# Altium PCB DBG-010.PcbDoc (part 2 of 2)
Units mil, origin at the board's own origin, x right, y up, seen from the top; angles counter-clockwise.
Board outline 2950 x 3200 mil, 4 copper layers (Top Layer, Layer 1, Layer 2, Bottom Layer), stack 61.811 mil thick; 92 components, 108 nets, 611 pads, 149 vias.
Unrouted connection lines stored in the file: 194.
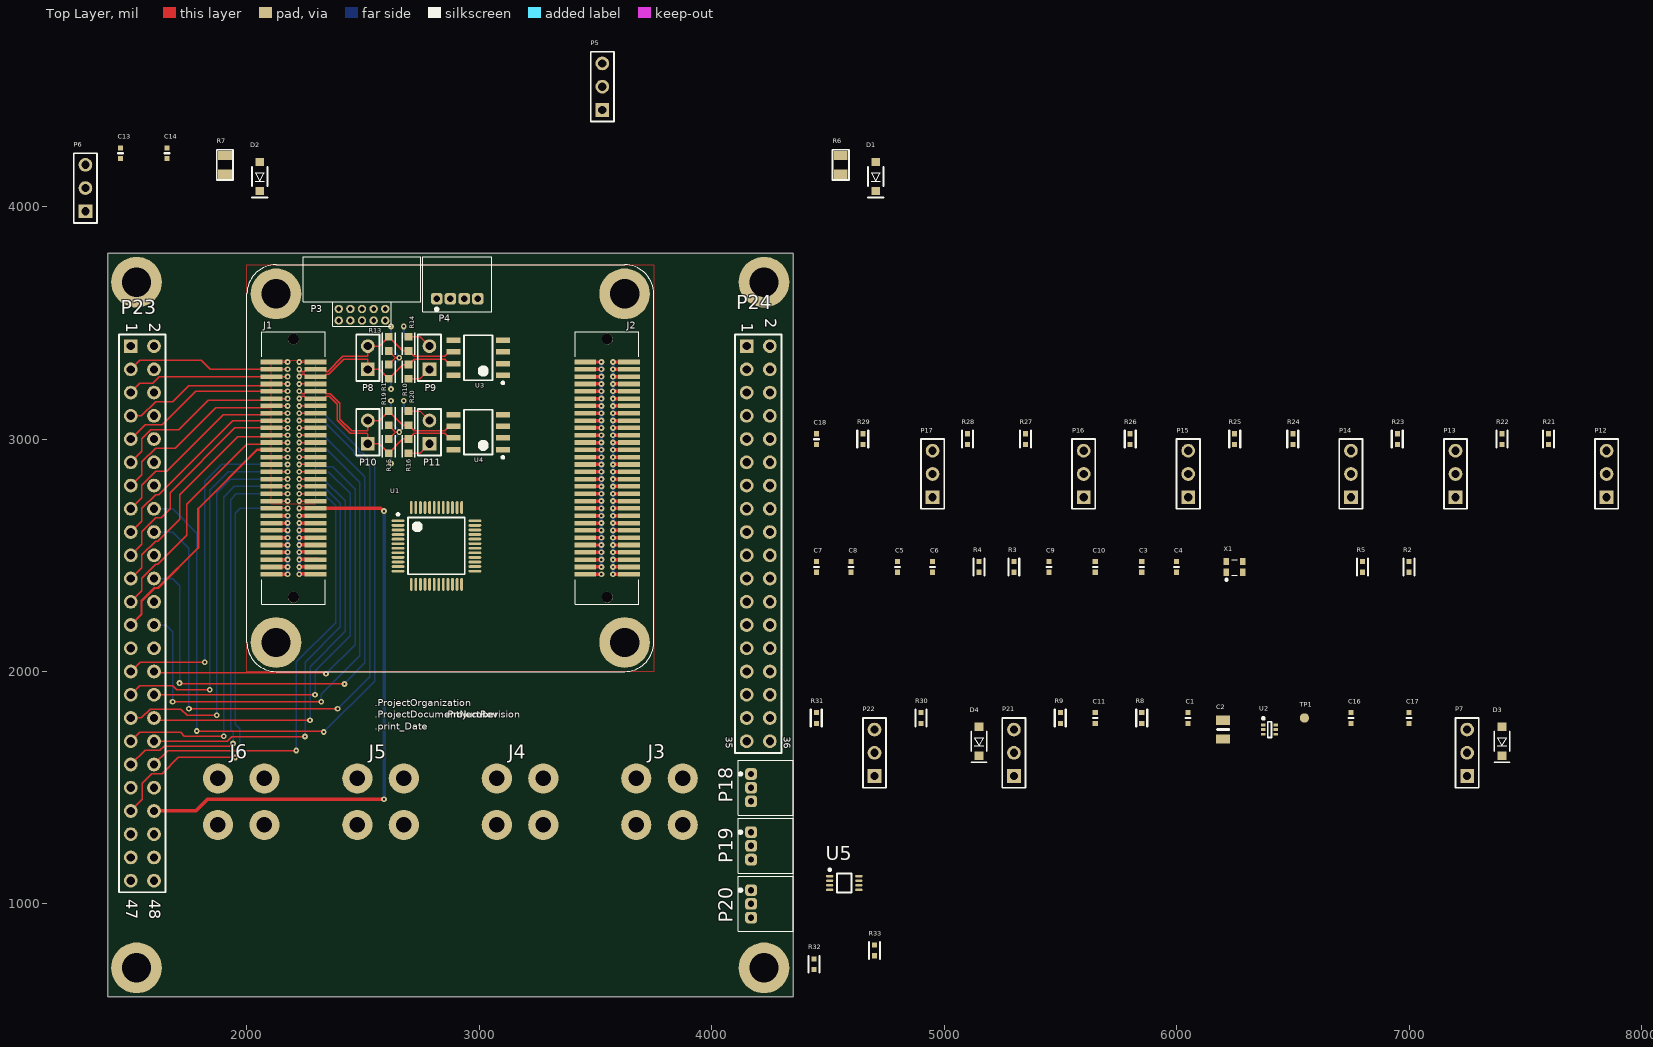
[diagram p0: Top Layer view]

## Via types
v1: diameter 25, hole 10, Top Layer to Bottom Layer, tented both sides, 120 vias
v2: diameter 25, hole 10, Top Layer to Bottom Layer, 29 vias

## Nets (pads, with @x,y where several pads share a name; then routed paths per layer and width w, separated by ;. In a path a pad name is that pad's centre, name@x,y a point inside that pad or via, vN(x,y) a via of type N, cw(c..) or ccw(c..) an arc to the next point about the centre after c; other vN are vias at no path point) (continued)
copper on no net: (continued)
  Top Layer w6: v1(2225,2859.25) 2294.49,2859.25

## Polygon pours and split planes (outlines as drawn)
DRAIN on Top Layer "Top Layer-DRAIN" (solid, remove dead copper, shelved, pour order 8): 2105.51,3340 2294.49,3340 2294.49,2720 2105.51,2720
GND on Top Layer "Top Layer-GND" (solid, remove dead copper, shelved, pour order 7): 2000,3750 3750,3750 3750,2000 2000,2000
+VBAT on Bottom Layer "+VBAT_L04_P010" (solid, pour order 10): 3390.98,3000.98 3280,2890 3280,2130 3570,1840 3570,1250 3970,1250 3970,2120 3680,2410 3550,2410 3540,2420 3540,3000.98
GND on Bottom Layer "Bottom Layer-GND" (solid, remove dead copper, shelved, pour order 6): 3750,3750 2000,3750 2000,2000 3750,2000
DRAIN on Bottom Layer "Bottom Layer-DRAIN" (solid, remove dead copper, shelved, pour order 9): 2294.49,3340 2105.51,3340 2105.51,2720 2294.49,2720
GND on Layer 2 (split plane): 4329.9,620.1 1420.1,620.1 1420.1,3779.9 4329.9,3779.9
+12V on Layer 1 (split plane): 3569.91,3040.09 3430,3040.09 3427.39,3039.74 3425.67,3039.03 3424.96,3038.74 3422.87,3037.13 3292.87,2907.13 3291.26,2905.04 3290.26,2902.61 3289.91,2900 3289.91,1800 3290.26,1797.39 3291.26,1794.96 3292.87,1792.87 3439.91,1645.82 3439.91,620.1 2910.09,620.1 2910.09,1695.82 3007.13,1792.87 3008.74,1794.96 3009.03,1795.67 3009.74,1797.39 3010.09,1800 3010.09,3195.82 3254.18,3439.91 3569.91,3439.91
+VBAT on Layer 1 (split plane): 3564.91,2418.31 3565.26,2415.7 3566.27,2413.26 3567.87,2411.18 3576.18,2402.87 3578.26,2401.26 3578.98,2400.97 3580.7,2400.26 3583.31,2399.91 3685.82,2399.91 3939.91,2145.82 3939.91,1800 3940.26,1797.39 3941.26,1794.96 3942.87,1792.87 3989.91,1745.82 3989.91,620.1 3460.09,620.1 3460.09,1650 3459.74,1652.61 3458.74,1655.04 3457.13,1657.13 3310.09,1804.18 3310.09,2895.82 3434.18,3019.91 3564.91,3019.91
+5V on Layer 1 (split plane): 3609.91,3690.09 2200,3690.09 2197.39,3689.74 2194.96,3688.74 2192.87,3687.13 2191.26,3685.04 2190.26,3682.61 2189.91,3680 2189.91,2670.28 2190.26,2667.67 2191.26,2665.23 2192.87,2663.14 2194.96,2661.54 2197.39,2660.53 2200,2660.19 2369.91,2660.19 2369.91,2050 2370.26,2047.39 2371.26,2044.96 2372.87,2042.87 2722.87,1692.87 2724.96,1691.27 2726.68,1690.55 2727.39,1690.26 2730,1689.91 2889.91,1689.91 2889.91,620.1 1420.1,620.1 1420.1,3779.9 3609.91,3779.9
+3.3V on Layer 1 (split plane): 4329.9,620.1 4010.09,620.1 4010.09,1750 4009.74,1752.61 4009.24,1753.83 4008.74,1755.04 4007.13,1757.13 3960.09,1804.18 3960.09,2150 3959.74,2152.61 3958.74,2155.04 3957.13,2157.13 3697.13,2417.13 3695.04,2418.74 3692.61,2419.74 3690,2420.09 3587.49,2420.09 3585.09,2422.49 3585.09,3021.3 3587.13,3022.87 3588.74,3024.96 3589.74,3027.39 3590.09,3030 3590.09,3450 3589.74,3452.61 3588.74,3455.04 3587.13,3457.13 3585.04,3458.74 3582.61,3459.74 3580,3460.09 3250,3460.09 3247.39,3459.74 3245.67,3459.03 3244.96,3458.74 3242.87,3457.13 2992.87,3207.13 2991.26,3205.04 2990.26,3202.61 2989.91,3200 2989.91,1804.18 2895.82,1710.09 2734.18,1710.09 2390.09,2054.18 2390.09,2670.28 2389.74,2672.89 2388.74,2675.32 2387.13,2677.41 2385.04,2679.01 2382.61,2680.02 2380,2680.36 2210.09,2680.36 2210.09,3669.91 3620,3669.91 3622.61,3670.26 3625.04,3671.26 3627.13,3672.87 3628.74,3674.96 3629.74,3677.39 3630.09,3680 3630.09,3779.9 4329.9,3779.9

## Other copper
Top Layer:
  rectangle net DRAIN: 2105.51,3331.69 2294.49,3331.69
  pour cut-out: 2211.66,3345.03 2188.34,3345.03 2188.34,3349 2211.66,3349
  pour cut-out: 2188.34,2719.93 2211.66,2719.93 2211.66,2715.96 2188.34,2715.96
Bottom Layer:
  pour cut-out: 2211.66,2719.93 2188.34,2719.93 2188.34,2715.96 2211.66,2715.96
  pour cut-out: 2188.34,3345.03 2211.66,3345.03 2211.66,3349 2188.34,3349
Layer 1 (plane layer: these items are gaps in the copper):
  lines w20: 2900,600 2900,1700 ; 3450,600 3450,1650 3300,1800 3300,2900 3430,3030 3580,3030 3580,3450 3250,3450 3000,3200 3000,1800 2900,1700 ; 3575,3030 3575,2418.31 3583.31,2410 3690,2410 3950,2150 3950,1800 4000,1750 4000,600 ; 3620,3800 3620,3680 2200,3680 2200,2670.28 2380,2670.28 2380,2050 2730,1700 2900,1700

## Silkscreen, mask and mechanical layers (free items; w line width, h text height)
Top Overlay:
  lines w5: 2000,2125 ccw(c2125,2125) 2125,2000 3625,2000 ccw(c3625,2125) 3750,2125 3750,3625 ccw(c3625,3625) 3625,3750 2125,3750 ccw(c2125,3625) 2000,3625 2000,2125
  text ".ProjectOrganization" at 2550,1850 h30
  text ".ProjectDocumentNumber" at 2550,1800 h30
  text ".ProjectRevision" at 2850,1800 h30
  text ".print_Date" at 2550,1750 h30
Outline:
  lines w5: 2000,2125 ccw(c2125,2125) 2125,2000 3625,2000 ccw(c3625,2125) 3750,2125 3750,3625 ccw(c3625,3625) 3625,3750 2125,3750 ccw(c2125,3625) 2000,3625 2000,2125

## Text inside footprints (layer, text, board x,y; h text height)
P23: Top Overlay "47" at 1480,1020 h50 r270; Top Overlay "48" at 1580,1020 h50 r270; Top Overlay "1" at 1480,3500 h50 r270; Top Overlay "2" at 1580,3500 h50 r270
P24: Top Overlay "36" at 4310,1720 h30 r270; Top Overlay "35" at 4060,1720 h30 r270; Top Overlay "1" at 4130,3500 h50 r270; Top Overlay "2" at 4230,3520 h50 r270